# Altium PCB Mikrolysreklamen17.PcbDoc
Units mm, origin at the board's own origin, x right, y up, seen from the top; angles counter-clockwise.
Board outline 168.36 x 42.97 mm, 2 copper layers (Top Layer, Bottom Layer), stack 1.671 mm thick; 121 components, 173 nets, 631 pads, 212 vias.
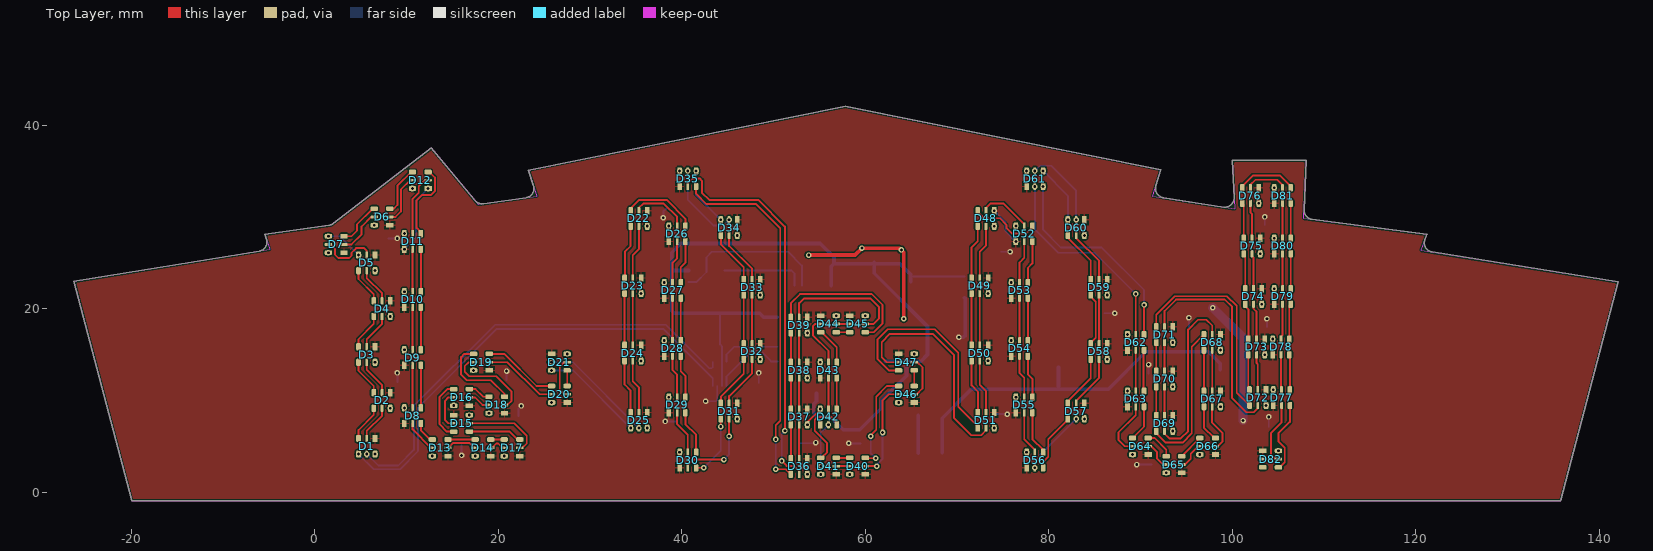
[diagram p0: Top Layer view]
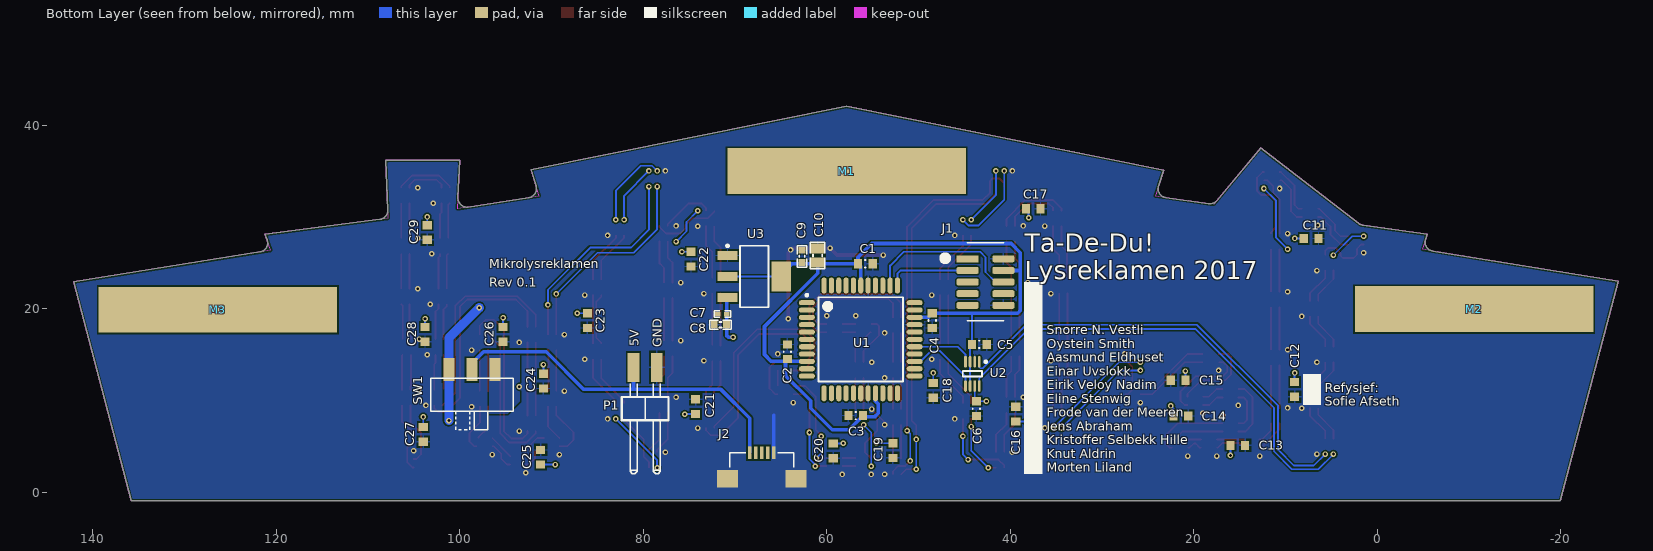
[diagram p1: Bottom Layer view, seen from below]

## Layer stack, top to bottom
Top Solder: solder mask 0.0102, Solder Resist, Dk 3.5
Top Layer: signal copper 0.0356
Dielectric 1: dielectric 1.6, FR-4, Dk 4.8
Bottom Layer: signal copper 0.0356
Bottom Solder: solder mask 0.0102, Solder Resist, Dk 3.5

## Board outline
-19.938,-0.919 -26.27,23 -6.067,26.276 -6.067,26.278 ccw(c-6.222,27.266) -5.272,27.58 -5.44,28.13 1.549,29.094 ccw(c1.423,30.086) 2.06,29.315 12.71,37.53 17.461,31.803 17.46,31.803 ccw(c18.232,32.438) 18.4,31.453 23.04,32.113 ccw(c22.886,33.101) 23.835,33.415 23.833,33.414 23.27,35.11 57.85,42.05 92.25,35.17 91.693,33.38 ccw(c92.65,33.093) 92.526,32.101 99.076,31.08 ccw(c99.217,32.07) 100.215,32.132 100,36.2 108.1,36.2 107.863,30.754 ccw(c108.862,30.722) 108.73,29.731 121.25,28.13 121.02,27.51 ccw(c121.961,27.174) 121.813,26.185 142.09,22.93 135.81,-0.92

## Design rules (kind name [scope] priority, off if disabled: settings)
Clearance [All] p1: gap=0.16 ignorepadtopadclearanceinfootprint=FALSE except(0: Arc-Text Arc-Hole Track-Text Track-Hole SMDPad-Text SMDPad-Hole THPad-Text THPad-Hole Via-Text Via-Hole Fill-Text Fill-Hole Poly-Text Poly-Hole Region-Text Region-Hole Text-Text Text-Hole)
Height [All] p1: minheight=0 maxheight=200 prefheight=12.7
HoleSize [All] p1: absolutevalues=TRUE maxlimit=6.35 minlimit=0.3 maxpercent=80.000 minpercent=20.000
MinimumSolderMaskSliver [All] p1: minsoldermaskwidth=0.1
PlaneClearance [All] p1: clearance=1
PlaneConnect [All] p1: planeconnectstyle=Relief reliefexpansion=0.508 reliefentries=4 reliefconductorwidth=1 reliefairgap=0.254
PolygonConnect PolygonConnect_1 [InNet('DUMMY_NET')] p1: connectstyle=Direct reliefconductorwidth=0.254 reliefentries=4 polygonreliefangle="90 Angle" airgapwidth=0.254
PolygonConnect PolygonConnect_2 [HasFootprint('FCI_10104111-0001LF') vs InNet('GND')] p2: connectstyle=Direct reliefconductorwidth=0.254 reliefentries=4 polygonreliefangle="90 Angle" airgapwidth=0.254
PolygonConnect [All] p3: thpad.connectstyle=Direct thpad.reliefconductorwidth=0.254 thpad.reliefentries=4 thpad.polygonreliefangle="90 Angle" thpad.airgapwidth=0.254 smdpad.connectstyle=Relief smdpad.reliefconductorwidth=0.2 smdpad.reliefentries=4 smdpad.polygonreliefangle="90 Angle" smdpad.airgapwidth=0.2 via.connectstyle=Direct via.reliefconductorwidth=0.254 via.reliefentries=4 via.polygonreliefangle="90 Angle" via.airgapwidth=0.254
RoutingVias [All] p1: holewidth=0.3 width=0.6 viastyle="Through Hole" minholewidth=0.3 minwidth=0.6 maxholewidth=6.35 maxwidth=10
SilkToSolderMaskClearance [IsPad] p1: minsilkscreentomaskgap=0.178 clearancetoexposedcopper=TRUE
SolderMaskExpansion [All] p1: expansion=0.102
Width [All] p1: maxlimit=1 minlimit=0.16 preferedwidth=0.2
24 further rules are at their usual default settings.

## Components (designator, comment, footprint, x,y, rotation, side; value= is the part's Value field where it differs from the comment)
C1 "100nF(0603)" CAPC0603(1608)55_N 55.8,24.9 r0 bottom
C2 "100nF(0603)" CAPC0603(1608)55_N 64.3,15.3 r270 bottom
C3 "100nF(0603)" CAPC0603(1608)55_N 56.85,8.35 r180 bottom
C4 "100nF(0603)" CAPC0603(1608)55_N 48.5,18.7 r90 bottom
C5 "100nF(0603)" CAPC0603(1608)55_N 43.379,16.1 r0 bottom
C6 "100nF(0603)" CAPC0603(1608)55_N 43.7,9.1 r90 bottom
C7 "100nF" CAPC1005X04L 71.4,19.4 r180 bottom
C8 "10µF" CAPC1608X06L 71.6,18.25 r180 bottom
C9 "10µF" CAPC1608X06L 62.7,25.7 r270 bottom
C10 "100µF" CAPC2012X11L 61,25.8 r270 bottom
C11 "100nF(0603)" CAPC0603(1608)55_N 7.2,27.65 r0 bottom
C12 "100nF(0603)" CAPC0603(1608)55_N 9,11.2 r90 bottom
C13 "100nF(0603)" CAPC0603(1608)55_N 15.2,5.1 r0 bottom
C14 "100nF(0603)" CAPC0603(1608)55_N 21.4,8.3 r0 bottom
C15 "100nF(0603)" CAPC0603(1608)55_N 21.7,12.2 r180 bottom
C16 "100nF(0603)" CAPC0603(1608)55_N 39.4,8.5 r270 bottom
C17 "100nF(0603)" CAPC0603(1608)55_N 37.5,30.9 r0 bottom
C18 "100nF(0603)" CAPC0603(1608)55_N 48.4,11.1 r90 bottom
C19 "100nF(0603)" CAPC0603(1608)55_N 52.8,4.533 r90 bottom
C20 "100nF(0603)" CAPC0603(1608)55_N 59.3,4.5 r90 bottom
C21 "100nF(0603)" CAPC0603(1608)55_N 74.3,9.317 r270 bottom
C22 "100nF(0603)" CAPC0603(1608)55_N 74.8,25.4 r90 bottom
C23 "100nF(0603)" CAPC0603(1608)55_N 86.1,18.7 r90 bottom
C24 "100nF(0603)" CAPC0603(1608)55_N 90.9,12.1 r90 bottom
C25 "100nF(0603)" CAPC0603(1608)55_N 91.2,3.8 r270 bottom
C26 "100nF(0603)" CAPC0603(1608)55_N 95.3,17.2 r90 bottom
C27 "100nF(0603)" CAPC0603(1608)55_N 104,6.3 r90 bottom
C28 "100nF(0603)" CAPC0603(1608)55_N 103.8,17.2 r90 bottom
C29 "100nF(0603)" CAPC0603(1608)55_N 103.567,28.3 r90 bottom
D1 "APA102 2020" PCBComponent_1 5.667,5 r270 top
D2 "APA102 2020" PCBComponent_1 7.333,10 r270 top
D3 "APA102 2020" PCBComponent_1 5.667,15 r270 top
D4 "APA102 2020" PCBComponent_1 7.333,20 r270 top
D5 "APA102 2020" PCBComponent_1 5.667,25 r270 top
D6 "APA102 2020" PCBComponent_1 7.333,30 r180 top
D7 "APA102 2020" PCBComponent_1 2.333,27 r180 top
D8 "APA102 2020" PCBComponent_1 10.667,8.333 r90 top
D9 "APA102 2020" PCBComponent_1 10.667,14.667 r90 top
D10 "APA102 2020" PCBComponent_1 10.667,21 r90 top
D11 "APA102 2020" PCBComponent_1 10.667,27.333 r90 top
D12 "APA102 2020" PCBComponent_1 11.5,34 r180 top
D13 "APA102 2020" PCBComponent_1 13.667,4.833 r180 top
D14 "APA102 2020" PCBComponent_1 18.333,4.833 r180 top
D15 "APA102 2020" PCBComponent_1 16,7.5 r0 top
D16 "APA102 2020" PCBComponent_1 16,10.333 r180 top
D17 "APA102 2020" PCBComponent_1 21.5,4.833 r180 top
D18 "APA102 2020" PCBComponent_1 19.833,9.5 r180 top
D19 "APA102 2020" PCBComponent_1 18.167,14.167 r180 top
D20 "APA102 2020" PCBComponent_1 26.667,10.667 r180 top
D21 "APA102 2020" PCBComponent_1 26.667,14.167 r0 top
D22 "APA102 2020" PCBComponent_1 35.333,29.833 r270 top
D23 "APA102 2020" PCBComponent_1 34.667,22.5 r270 top
D24 "APA102 2020" PCBComponent_1 34.667,15.167 r270 top
D25 "APA102 2020" PCBComponent_1 35.333,7.833 r270 top
D26 "APA102 2020" PCBComponent_1 39.5,28.167 r90 top
D27 "APA102 2020" PCBComponent_1 39,22 r90 top
D28 "APA102 2020" PCBComponent_1 39,15.667 r90 top
D29 "APA102 2020" PCBComponent_1 39.5,9.5 r90 top
D30 "APA102 2020" PCBComponent_1 40.667,3.5 r90 top
D31 "APA102 2020" PCBComponent_1 45.167,8.833 r270 top
D32 "APA102 2020" PCBComponent_1 47.667,15.333 r270 top
D33 "APA102 2020" PCBComponent_1 47.667,22.333 r270 top
D34 "APA102 2020" PCBComponent_1 45.167,28.833 r270 top
D35 "APA102 2020" PCBComponent_1 40.667,34.167 r90 top
D36 "APA102 2020" PCBComponent_1 52.8,2.8 r270 top
D37 "APA102 2020" PCBComponent_1 52.8,8.2 r270 top
D38 "APA102 2020" PCBComponent_1 52.8,13.3 r270 top
D39 "APA102 2020" PCBComponent_1 52.8,18.2 r270 top
D40 "APA102 2020" PCBComponent_1 59.167,2.833 r180 top
D41 "APA102 2020" PCBComponent_1 56,2.833 r180 top
D42 "APA102 2020" PCBComponent_1 56,8.2 r90 top
D43 "APA102 2020" PCBComponent_1 56,13.3 r90 top
D44 "APA102 2020" PCBComponent_1 56,18.333 r0 top
D45 "APA102 2020" PCBComponent_1 59.167,18.333 r0 top
D46 "APA102 2020" PCBComponent_1 64.5,10.667 r180 top
D47 "APA102 2020" PCBComponent_1 64.5,14.167 r0 top
D48 "APA102 2020" PCBComponent_1 73.167,29.833 r270 top
D49 "APA102 2020" PCBComponent_1 72.5,22.5 r270 top
D50 "APA102 2020" PCBComponent_1 72.5,15.167 r270 top
D51 "APA102 2020" PCBComponent_1 73.167,7.833 r270 top
D52 "APA102 2020" PCBComponent_1 77.333,28.167 r90 top
D53 "APA102 2020" PCBComponent_1 76.833,22 r90 top
D54 "APA102 2020" PCBComponent_1 76.833,15.667 r90 top
D55 "APA102 2020" PCBComponent_1 77.333,9.5 r90 top
D56 "APA102 2020" PCBComponent_1 78.5,3.5 r90 top
D57 "APA102 2020" PCBComponent_1 83,8.833 r270 top
D58 "APA102 2020" PCBComponent_1 85.5,15.333 r270 top
D59 "APA102 2020" PCBComponent_1 85.5,22.333 r270 top
D60 "APA102 2020" PCBComponent_1 83,28.833 r270 top
D61 "APA102 2020" PCBComponent_1 78.5,34.167 r90 top
D62 "APA102 2020" PCBComponent_1 89.5,16.333 r90 top
D63 "APA102 2020" PCBComponent_1 89.5,10.167 r90 top
D64 "APA102 2020" PCBComponent_1 90,5 r180 top
D65 "APA102 2020" PCBComponent_1 93.667,3 r180 top
D66 "APA102 2020" PCBComponent_1 97.333,5 r180 top
D67 "APA102 2020" PCBComponent_1 97.833,10.167 r270 top
D68 "APA102 2020" PCBComponent_1 97.833,16.333 r270 top
D69 "APA102 2020" PCBComponent_1 92.633,7.5 r270 top
D70 "APA102 2020" PCBComponent_1 92.633,12.333 r270 top
D71 "APA102 2020" PCBComponent_1 92.633,17.167 r270 top
D72 "APA102 2020" PCBComponent_1 102.8,10.3 r270 top
D73 "APA102 2020" PCBComponent_1 102.667,15.833 r270 top
D74 "APA102 2020" PCBComponent_1 102.333,21.333 r270 top
D75 "APA102 2020" PCBComponent_1 102.167,26.833 r270 top
D76 "APA102 2020" PCBComponent_1 102,32.333 r270 top
D77 "APA102 2020" PCBComponent_1 105.4,10.3 r90 top
D78 "APA102 2020" PCBComponent_1 105.333,15.833 r90 top
D79 "APA102 2020" PCBComponent_1 105.5,21.333 r90 top
D80 "APA102 2020" PCBComponent_1 105.5,26.833 r90 top
D81 "APA102 2020" PCBComponent_1 105.5,32.333 r90 top
D82 "APA102 2020" PCBComponent_1 104.2,3.6 r0 top
J1 "Header SMD 127 2x5" SMDHDRV10P127_2X5_615X330X560B 42.7,22.9 r180 bottom
J2 "MicroUSB-AB" FCI_10104111-0001LF 67.1,4.3 r90 bottom
M1 "Imponatornål" Imponatornaal_liten 57.85,35 r180 top
M2 "Imponatornål" Imponatornaal_liten -10.57,19.95 r180 top
M3 "Imponatornål" Imponatornaal_liten 126.39,19.88 r180 top
P1 "Pin List 1x2, Angled" LIST_ANG_1x2-SMD-2.54MM 79.8,13.6 r180 bottom
SW1 "Switch" JS102011SAQN 98.7,10.6 r180 bottom
U1 "AVR ATXMEGA64A4U-AU" TQFP80P1200X1200X120-44N 56.3,16.65 r180 bottom
U2 "TXS0102DCUR" TSSOP50P310X90-8N 44.129,12.891 r270 bottom
U3 "TLV1117" SOT230P700X180-4N 67.9,23.5 r180 bottom

## Footprints (in the part's own frame and the unit in brackets; to place one, negate y for a bottom-side part, rotate by r counter-clockwise, add the part's x,y. Pads: shape width x height; smd on the part's side, far side on the other; paste and mask are expansions set on the pad)
CAPC0603(1608)55_N [mm] "Chip Capacitor, Body 1.6x0.8mm, Height 0.55mm, IPC Medium Density"
  rect 0.9x1 smd: 1(-0.8,0) 2(0.8,0)
  silkscreen extent -0.05,-0.4 0.05,0.4, body extent -0.87,-0.48 0.88,0.47, height 0.55
CAPC1005X04L [mm] "Chip Capacitor, 2-Leads, Body 1.0x0.5mm, IPC High Density"
  rect 0.6x0.5 smd: 1(-0.5,0) 2(0.5,0)
  silkscreen extent -0.9,-0.35 0.9,0.35, body extent -0.51,-0.25 0.51,0.25, height 0.5
CAPC1608X06L [mm] "Chip Capacitor, 2-Leads, Body 1.6x0.8mm, IPC High Density"
  rect 0.75x0.8 smd: 1(-0.675,0) 2(0.675,0)
  silkscreen extent -1.17,-0.5 1.17,0.5, body extent -0.8,-0.43 0.8,0.43, height 0.8
CAPC2012X11L [mm] "Chip Capacitor, 2-Leads, Body 2.0x1.3mm, IPC High Density"
  rect 1.1x1.4 smd: 1(-0.75,0) 2(0.75,0)
  silkscreen extent -1.43,-0.8 1.42,0.8, body extent -1,-0.62 1,0.63, height 0.77
FCI_10104111-0001LF [mm] "Micro USB AB SMT"
  rect 1.4x0.4 smd: 1(0,1.3) 2(0,0.65) 3(0,0) 4(0,-0.65) 5(0,-1.3)
  rect 1.9x2.3 smd: 6(-2.85,-3.75) 6(-2.85,3.75)
  silkscreen extent -1.6,-3.5 0,3.5, body extent -5.6,-4.4 0,4.4, height 2.74
Imponatornaal_liten [mm]
  rect 26x5 smd far side: 0(0,0)
JS102011SAQN [mm] "Slide Switches - SPDT, SMD, ON-ON"
  rect 1.2x2.5 smd: 1(-2.5,2.75) 2(0,2.75) 3(2.5,2.75)
  silkscreen extent -4.5,-3.8 4.5,1.8, body extent -4.52,-3.8 4.52,3.75, height 3.5
LIST_ANG_1x2-SMD-2.54MM [mm] "Pin List, 2.54mm, Surface Mount, Angled"
  rect 1.27x3.18 smd: 1(-1.27,0) 2(1.27,0)
  silkscreen extent -2.54,-11.58 2.54,-1.8, body extent -2.56,-11.61 2.52,1.35, height 3.03
PCBComponent_1 [mm]
  rect 0.8x0.5 smd: 1(-0.85,0.9)
  rrect50% 0.8x0.3 smd: 2(-0.85,0) 5(0.85,0)
  rrect50% 0.8x0.5 smd: 3(-0.85,-0.9) 4(0.85,-0.9) 6(0.85,0.9)
  body extent -1,-1 1,1, height 0.9
SMDHDRV10P127_2X5_615X330X560B [mm] "SMD 2X5 Vertical Header"
  rect 2.4x0.76 smd: 1(-1.95,2.54)
  rrect50% 2.4x0.76 smd: 2(1.95,2.54) 3(-1.95,1.27) 4(1.95,1.27) 5(-1.95,0) 6(1.95,0) 7(-1.95,-1.27) 8(1.95,-1.27) 9(-1.95,-2.54) 10(1.95,-2.54)
  silkscreen extent -4.54,-4.21 1.95,4.29
SOT230P700X180-4N [mm] "SOT223, 4-Leads, Body 6,50x7,00mm (avg), Pitch 2,30mm, IPC Medium Density"
  rect 2.15x1 smd: 1(-2.925,2.3) 2(-2.925,0) 3(-2.925,-2.3)
  rect 2.15x3.25 smd: 4(2.925,0)
  silkscreen extent -3.05,-3.35 1.55,3.47, body extent -3.54,-3.25 3.54,3.25, height 1.65
TQFP80P1200X1200X120-44N [mm] "TQFP, 44-Leads, Body 10,00x10,00mm, Pitch 0,80mm, IPC Medium Density"
  oval 1.75x0.55 smd: 1(-5.875,4) 2(-5.875,3.2) 3(-5.875,2.4) 4(-5.875,1.6) 5(-5.875,0.8) 6(-5.875,0) 7(-5.875,-0.8) 8(-5.875,-1.6) 9(-5.875,-2.4) 10(-5.875,-3.2) 11(-5.875,-4) 23(5.875,-4) 24(5.875,-3.2) 25(5.875,-2.4) 26(5.875,-1.6) 27(5.875,-0.8) 28(5.875,0) 29(5.875,0.8) 30(5.875,1.6) 31(5.875,2.4) 32(5.875,3.2) 33(5.875,4)
  oval 0.55x1.75 smd: 12(-4,-5.875) 13(-3.2,-5.875) 14(-2.4,-5.875) 15(-1.6,-5.875) 16(-0.8,-5.875) 17(0,-5.875) 18(0.8,-5.875) 19(1.6,-5.875) 20(2.4,-5.875) 21(3.2,-5.875) 22(4,-5.875) 34(4,5.875) 35(3.2,5.875) 36(2.4,5.875) 37(1.6,5.875) 38(0.8,5.875) 39(0,5.875) 40(-0.8,5.875) 41(-1.6,5.875) 42(-2.4,5.875) 43(-3.2,5.875) 44(-4,5.875)
  silkscreen extent -6,-4.6 4.6,4.95, body extent -6.03,-5.97 5.97,6.03, height 1.1
TSSOP50P310X90-8N [mm] "TSSOP, 8-Leads, Body 2,1x2,4mm (max), Pitch 0,50mm, IPC Medium Density"
  oval 1.25x0.3 smd: 1(-1.325,0.75) 2(-1.325,0.25) 3(-1.325,-0.25) 4(-1.325,-0.75) 5(1.325,-0.75) 6(1.325,-0.25) 7(1.325,0.25) 8(1.325,0.75)
  silkscreen extent -1.45,-1.05 0.3,1.57, body extent -1.55,-1.05 1.55,1.05, height 0.8

## Part data
C1 C2 C3 C4 C5 C6 C11 C12 C13 C14 C15 C16 C17 C18 C19 C20 C21 C22 C23 C24 C25 C26 C27 C28 C29: library part 3028, "100nF 0603 5% X7R 50V", id=3028, leverandor=Farnell, leverandor_varenr=1759122, navn=100nF(0603), nokkelord="Kondensator, Capacitor, CAP", pakke_opprettet="18.02.2015 14:18:13", pakke_opprettet_av=815, pakketype=93, pris=1, produsent=Multikomp, symbol_opprettet="14.11.2014 20:19:34", symbol_opprettet_av=815
C7: library part C0402-100n, "Capacitor, X7R, ±10%", Artikkelnr Noca=20039200, Artikkelnr Simpro=N.A., Footprint Doc=0402, LatestRevisionDate=2009-11-23, Note=16V, Part Number=C0402-100n, Pin Count=2, Published=2009-05-08, Publisher="Nordic Semiconductor"
C8 C9: library part C0603-10µ, "Capacitor, X5R, ±20%", Artikkelnr Noca=20039234, Artikkelnr Simpro=N.A., Footprint Doc=0603, LatestRevisionDate=2011-01-17, Note=6.3V, Part Number=C0603-10µ, Pin Count=2, Published=2011-01-17, Publisher="Nordic Semiconductor"
C10: library part C0805-TBD, "Chip Cap 0805", Artikkelnr Noca=N.A., Artikkelnr Simpro=N.A., Footprint Doc=0805, LatestRevisionDate=2013-12-17, Note="Chip Cap", Part Number=C0805-TBD, Pin Count=2, Published=2013-12-17, Publisher="Nordic Semiconductor"
D1 D2 D3 D4 D5 D6 D7 D8 D9 D10 D11 D12 D13 D14 D15 D16 D17 D18 D19 D20 D21 D22 D23 D24 D25 D26 D27 D28 D29 D30 D31 D32 D33 D34 D35 D36 D37 D38 D39 D40 D41 D42 D43 D44 D45 D46 D47 D48 D49 D50 D51 D52 D53 D54 D55 D56 D57 D58 D59 D60 D61 D62 D63 D64 D65 D66 D67 D68 D69 D70 D71 D72 D73 D74 D75 D76 D77 D78 D79 D80 D81 D82: library part APA102_2020, AdaFruit=3341, DigiKey=1528-2392-ND
J1: library part 2449, "1,27mm Pitch SMD Header", id=2449, navn="Header SMD 127 2x5", nokkelord=JTAG, pakke_opprettet="15.11.2014 18:30:38", pakke_opprettet_av=815, pakketype=101, pris=20, symbol_opprettet="15.11.2014 18:33:29", symbol_opprettet_av=815
J2: library part "FCI 10104111-0001LF", "MicroUSB-AB-SMT", Manufacturer=FCI, Manufacturer Part Number=10104111-0001LF, Part number IPS=N.A., Supplier Part Number 1=609-4053-1-ND, Artikkelnr Noca=55029118, ComponentLink1Description=Datasheet, ComponentLink2Description="Supplier link", Footprint Doc=FCI_10104111-0001LF, HelpURL=http://portal.fciconnect.com/Comergent//fci/drawing/10104111.pdf, LatestRevisionDate=2014-01-14, Part Number="FCI 10104111-0001LF", Pin Count=5, Published=2014-01-14, Publisher="Nordic Semiconductor", Supplier 1=Digi-Key, Supplier 2=Mouser, Supplier Part Number 2=649-10104111-0001LF
M1 M2 M3: library part 3331, "nål til imponatorplate 20mm (Brooch back)", antall=41, dybde=1, hylle=4, id=3331, lager_type=Fremlager, leverandor_varenr=600721, navn=Imponatornål, nokkelord=cchobby.no, pakke_opprettet="15.11.2018 22:49:40", pakke_opprettet_av=815, pakketype=SMD, pris=5, produsent="Jewellery Maker", rad=0, rom=OV, symbol_opprettet="23.10.2015 21:10:45", symbol_opprettet_av=815
P1: library part "Pin List Ang 1x2 SMD, 2.54mm", "Pin List 1x2, 2.54mm (100mil), Right Angled, SMD", Manufacturer=W-CON, Manufacturer Part Number=1125B-1102S0Z135R2, Part number IPS=N.A., Artikkelnr Noca=55010023, ComponentLink1Description=Datasheet, ComponentLink2Description="Supplier link", Footprint Doc=LIST_ANG_1x2-SMD-2.54MM, HelpURL=\\hizz\pro\app9717\Datasheet\connectores\W-CON\1125B-11XXXXZXXXXX.pdf, LatestRevisionDate=2016-05-26, Part Number="Pin List Ang 1x2 SMD, 2.54mm", Pin Count=2, Published=2016-01-22, Publisher="Nordic Semiconductor", Supplier 1=Cabcon, Supplier 2=Samtec, Supplier Part Number 1=1125B-1102S0Z135R2, Supplier Part Number 2=TSM-102-01-L-SH-A
SW1: library part JS102011SAQN, "SMD slide Switch (ON-ON)", Manufacturer="C&K Components", Part number IPS=N.A., Supplier Part Number 1=401-1999-1-ND, Artikkelnr Noca=50019064, ComponentLink1Description=Datasheet, ComponentLink2Description="Supplier link", Footprint Doc=JS102011SAQN, HelpURL=http://www.ck-components.com/14398/js_14july11.pdf/, LatestRevisionDate=2011-08-15, Manufacturer Part Number=JS102011SAQN, Part Number=JS102011SAQN, Pin Count=3, Published=2011-08-15, Publisher="Nordic Semiconductor", Supplier 1=Digi-Key, Supplier 2=Mouser, Supplier Part Number 2=611-JS102011SAQN
U1: library part 2103, "Mikrokontroller", antall=75, dybde=0, hylle=0, id=2103, kolonne=2, lager_type=Fremlager, navn="AVR ATXMEGA64A4U-AU", pakke_opprettet="22.08.2014 14:00:28", pakke_opprettet_av=774, pakketype=45, pris=0, produsent=Atmel, rad=4, rom=OV, symbol_opprettet="22.08.2014 14:00:55", symbol_opprettet_av=774
U2: "IC VOLT-LEVEL TRANSLATOR 8-US8", Manufacturer="Texas Instruments", Part number IPS=N.A., Supplier Part Number 1=296-21931-1-ND, Artikkelnr Noca=N.A., ComponentLink1Description=Datasheet, ComponentLink2Description="Supplier link", Footprint Doc=8-VFSOP, HelpURL=http://www.ti.com/lit/ds/symlink/txs0102.pdf, LatestRevisionDate=2012-09-06, Manufacturer Part Number=TXS0102DCUR, Note="TEXAS INSTRUMENTS - TXS0102DCUR - IC, TRANSLATOR", Part Number=TXS0102DCUR, Pin Count=8, Published=2012-09-06, Publisher="Nordic Semiconductor", Supplier 1=Digi-Key, Supplier 2=Farnell, Supplier Part Number 2=170-3315
U3: library part TLV1117-33CDCYR, "REG LDO 3.3V 0.8A SOT223", Manufacturer="Texas Instruments", Part number IPS=N.A., Supplier Part Number 1=296-21112-1-ND, Artikkelnr Noca=N.A., ComponentLink1Description=Datasheet, ComponentLink1URL=http://www.ti.com/lit/ds/symlink/tlv1117.pdf, ComponentLink2Description="Supplier link", Footprint Doc=SOT-223, LatestRevisionDate=2018-08-10, Manufacturer Part Number=TLV1117-33CDCYR, Part Number=TLV1117-33CDCYR, Pin Count=4, Published=2018-08-10, Publisher="Nordic Semiconductor", Supplier 1=Digi-Key

## Via types
v1: diameter 0.6, hole 0.3, Top Layer to Bottom Layer, tented both sides, 212 vias

## Nets (pads, with @x,y where several pads share a name; then routed paths per layer and width w, separated by ;. In a path a pad name is that pad's centre, name@x,y a point inside that pad or via, vN(x,y) a via of type N, cw(c..) or ccw(c..) an arc to the next point about the centre after c; other vN are vias at no path point)
CKI: D1.5 U2.1 | length 50
  Bottom Layer w0.2: v1(5.667,4.15) 6.917,2.9 9.1,2.9 10.8,4.6 10.8,9.4 19.65,18.25 38.25,18.25 43,13.5 43.25,13.5 43.379,13.629 U2.1
  other v1: 5.667,4.15
DUMMY_NET: SW1.3
GND: C1.1 C2.1 C3.1 C4.1 C5.1 C6.1 C7.1 C8.1 C9.1 C10.1 C11.1 C12.1 C13.1 C14.1 C15.1 C16.1 C17.1 C18.1 C19.1 C20.1 C21.1 C22.1 C23.1 C24.1 C25.1 C26.1 C27.1 C28.1 C29.1 D1.6 D2.6 D3.6 D4.6 D5.6 D6.6 D7.6 D8.6 D9.6 D10.6 D11.6 D12.6 D13.6 D14.6 D15.6 D16.6 D17.6 D18.6 D19.6 D20.6 D21.6 D22.6 D23.6 D24.6 D25.6 D26.6 D27.6 D28.6 D29.6 D30.6 D31.6 D32.6 D33.6 D34.6 D35.6 D36.6 D37.6 D38.6 D39.6 D40.6 D41.6 D42.6 D43.6 D44.6 D45.6 D46.6 D47.6 D48.6 D49.6 D50.6 D51.6 D52.6 D53.6 D54.6 D55.6 D56.6 D57.6 D58.6 D59.6 D60.6 D61.6 D62.6 D63.6 D64.6 D65.6 D66.6 D67.6 D68.6 D69.6 D70.6 D71.6 D72.6 D73.6 D74.6 D75.6 D76.6 D77.6 D78.6 D79.6 D80.6 D81.6 D82.6 J1.2 J1.10 J2.5 J2.6 P1.2 U1.8 U1.18 U1.30 U1.38 U2.2 U3.1 | length 24.5
  Top Layer w0.2: v1(53.7,7.35) 53.7,7.609 55.1,9.009 v1(55.1,9.05)
  Top Layer w0.4: v1(53.85,25.85) 58.9,25.85 v1(59.65,26.6) 63.75,26.6 v1(63.95,26.4) 64.2,26.15 v1(64.2,18.9)
  Bottom Layer w0.4: J2.5@65.8,4.27 J2.5 65.8,8.35
  other v1: 55.15,1.933 58.317,1.933 53.7,1.95 92.817,2.1 12.817,3.933 17.483,3.933 20.65,3.933 89.15,4.1 96.483,4.1 6.567,4.15 39.767,4.35 77.6,4.35 105.05,4.5 93.533,6.65 74.067,6.983 36.233,7 46.067,7.983 83.9,7.983 16.85,8.4 19,8.6 8.233,9.15 9.767,9.183 98.733,9.317 15.15,9.45 103.7,9.45 25.817,9.767 63.65,9.767 38.6,10.35 76.433,10.35 88.6,11.017 104.5,11.15 93.533,11.483 53.7,12.45 17.3,13.267 6.567,14.15 55.1,14.15 35.567,14.3 73.4,14.317 48.567,14.483 86.4,14.483 103.567,14.983 27.517,15.067 65.35,15.067 98.733,15.483 9.767,15.517 93.533,16.317 38.1,16.517 75.933,16.517 104.433,16.683 88.6,17.183 53.7,17.35 8.233,19.15 56.85,19.233 60.017,19.233 103.233,20.483 48.567,21.483 86.4,21.483 35.567,21.65 73.4,21.65 9.767,21.85 104.6,22.183 38.1,22.85 75.933,22.85 6.567,24.15 103.067,25.983 1.483,26.1 104.6,27.683 46.067,27.983 83.9,27.983 9.767,28.183 74.067,28.983 36.233,29 38.6,29.017 76.433,29.017 6.483,29.1 102.9,31.483 10.65,33.1 104.6,33.183 39.767,35.017 77.6,35.017
NetD1_2: D1.2 D2.5 | length 4
  Top Layer w0.2: D1.2 5.667,6.667 7.333,8.333 D2.5@7.333,9.183
NetD1_3: D1.3 D2.4 | length 4
  Top Layer w0.2: D1.3 4.767,6.767 6.433,8.433 D2.4
NetD2_2: D2.2 D3.5 | length 4
  Top Layer w0.2: D3.5 5.667,13.333 7.333,11.667 D2.2
NetD2_3: D2.3 D3.4 | length 4
  Top Layer w0.2: D3.4 4.767,13.233 6.433,11.567 D2.3
NetD3_2: D3.2 D4.5 | length 4
  Top Layer w0.2: D3.2 5.667,16.667 7.333,18.333 D4.5
NetD3_3: D3.3 D4.4 | length 4
  Top Layer w0.2: D3.3 4.767,16.667 6.433,18.333 D4.4
NetD4_2: D4.2 D5.5 | length 4
  Top Layer w0.2: D5.5 5.667,23.333 7.333,21.667 D4.2
NetD4_3: D4.3 D5.4 | length 4
  Top Layer w0.2: D5.4 4.767,23.233 6.433,21.567 D4.3
NetD5_2: D5.2 D7.5 | length 6.4
  Top Layer w0.2: D7.5 1.733,27 2.2,26.533 2.2,25.897 2.572,25.525 3.75,25.525 4,25.775 4,26.1 4.5,26.6 5.4,26.6 5.667,26.333 D5.2
NetD5_3: D5.3 D7.4 | length 4.1
  Bottom Layer w0.2: v1(1.483,27.9) 2.717,27.9 v1(4.767,25.85)
  other v1: 4.767,25.85 1.483,27.9
NetD6_2: D6.2 D12.5 | length 5.5
  Top Layer w0.2: D6.2 8.8,30 9.4,30.6 9.4,33 10.4,34 D12.5@10.6,34
NetD6_3: D6.3 D12.4 | length 5.4
  Top Layer w0.2: D6.3 8.6,30.9 9,31.3 9,33.4 10.5,34.9 D12.4
NetD6_4: D6.4 D7.3 | length 5
  Top Layer w0.2: D7.3 4,27.9 4.6,28.5 4.6,29.2 6.3,30.9 D6.4
NetD6_5: D6.5 D7.2 | length 5
  Top Layer w0.2: D7.2 4,27 5.1,28.1 5.1,28.957 6.143,30 D6.5
NetD8_2: D8.2 D13.5 | length 3.7
  Top Layer w0.2: D8.2 10.667,6.833 12.7,4.8 D13.5@12.9,4.8
NetD8_3: D8.3 D13.4 | length 2.4
  Top Layer w0.2: D8.3 11.567,6.733 12.567,5.733 D13.4
NetD8_4: D8.4 D9.3 | length 4.6
  Top Layer w0.2: D8.4 D9.3
NetD8_5: D8.5 D9.2 | length 4.6
  Top Layer w0.2: D8.5 D9.2
NetD9_4: D9.4 D10.3 | length 4.6
  Top Layer w0.2: D9.4 D10.3
NetD9_5: D9.5 D10.2 | length 4.6
  Top Layer w0.2: D9.5 D10.2
NetD10_4: D10.4 D11.3 | length 4.6
  Top Layer w0.2: D10.4 D11.3
NetD10_5: D10.5 D11.2 | length 4.6
  Top Layer w0.2: D10.5 D11.2
NetD11_4: D11.4 D12.3 | length 8.7
  Top Layer w0.2: D11.4 11.567,28.333 11.1,28.8 11.1,31.8 11.7,32.4 12.7,32.4 13.1,32.8 13.1,34.3 12.5,34.9 D12.3
NetD11_5: D11.5 D12.2 | length 6.7
  Top Layer w0.2: D11.5 10.667,31.967 11.33,32.63 11.33,33.33 12,34 D12.2
NetD13_2: D13.2 D14.5 | length 3.4
  Top Layer w0.2: D13.2 14.561,4.833 15.101,5.373 16.823,5.373 17.363,4.833 D14.5
NetD13_3: D13.3 D14.4 | length 3
  Top Layer w0.2: D13.3 D14.4
NetD14_2: D14.2 D17.5 | length 1.9
  Top Layer w0.2: D14.2 19.333,4.833 19.8,5.3 20,5.3 20.467,4.833 D17.5
NetD14_3: D14.3 D17.4 | length 1.5
  Top Layer w0.2: D14.3 D17.4
NetD15_2: D15.2 D16.5 | length 4.3
  Top Layer w0.2: D15.2 14.533,7.5 14.2,7.833 14.2,9.967 14.567,10.333 D16.5
NetD15_3: D15.3 D16.4 | length 6.8
  Top Layer w0.2: D15.3 14.4,6.6 13.6,7.4 13.6,10.4 14.433,11.233 D16.4
NetD15_4: D15.4 D17.3 | length 5.9
  Top Layer w0.2: D15.4 21.25,6.6 22.117,5.733 D17.3
NetD15_5: D15.5 D17.2 | length 8.6
  Top Layer w0.2: D15.5 21.75,7.5 23.1,6.15 23.1,5.3 22.633,4.833 D17.2
NetD16_2: D16.2 D18.5 | length 2.5
  Top Layer w0.2: D16.2 17.467,10.333 18.3,9.5 D18.5 D18.5@19,9.5
NetD16_3: D16.3 D18.4 | length 2.5
  Top Layer w0.2: D16.3 17.517,11.233 18.35,10.4 D18.4 D18.4@19.017,10.4
NetD18_2: D18.2 D19.5 | length 9.7
  Top Layer w0.2: D19.5@17.267,14.167 16.767,14.167 16.35,13.75 16.35,13.125 16.834,12.641 19.759,12.641 21.45,10.95 21.45,9.95 21,9.5 D18.2
NetD18_3: D18.3 D19.4 | length 9.3
  Top Layer w0.2: D19.4@17.267,15.067 16.3,15.067 15.95,14.717 15.95,12.8 16.55,12.2 19.2,12.2 20.683,10.717 D18.3
NetD19_2: D19.2 D20.5 | length 8.2
  Top Layer w0.2: D19.2 21,14.167 24.5,10.667 D20.5
NetD19_3: D19.3 D20.4 | length 8.2
  Top Layer w0.2: D19.3 20.667,15.067 24.167,11.567 D20.4
NetD20_2: D20.2 D21.5 | length 4.5
  Top Layer w0.2: D20.2 27.183,10.667 26.7,11.15 26.7,13.65 27.217,14.167 D21.5
NetD20_3: D20.3 D21.4 | length 1.7
  Top Layer w0.2: D20.3 D21.4
NetD21_2: D21.2 D25.5 | length 12.5
  Bottom Layer w0.2: v1(25.817,14.167) 28.15,14.167 v1(35.333,6.983)
  other v1: 35.333,6.983 25.817,14.167
NetD21_3: D21.3 D25.4 | length 11.2
  Bottom Layer w0.2: v1(25.817,13.267) 28.15,13.267 v1(34.433,6.983)
  other v1: 34.433,6.983 25.817,13.267
NetD22_2: D22.2 D26.5 | length 6.2
  Top Layer w0.2: D22.2 35.333,30.983 35.8,31.45 38.05,31.45 39.5,30 D26.5
NetD22_3: D22.3 D26.4 | length 8.2
  Top Layer w0.2: D22.3@34.433,30.7 34.433,30.933 35.35,31.85 38.35,31.85 40.4,29.8 D26.4
NetD22_4: D22.4 D23.3 | length 5.8
  Top Layer w0.2: D23.3@33.8,23.45 33.8,26.2 34.433,26.833 D22.4
NetD22_5: D22.5 D23.2 | length 5.9
  Top Layer w0.2: D23.2 34.667,25.817 35.333,26.483 D22.5 D22.5@35.333,29
NetD23_4: D23.4 D24.3 | length 5.5
  Top Layer w0.2: D24.3@33.767,16.133 D23.4
NetD23_5: D23.5 D24.2 | length 5.6
  Top Layer w0.2: D24.2 D23.5
NetD24_4: D24.4 D25.3 | length 5.9
  Top Layer w0.2: D24.4 33.767,11.733 34.433,11.067 D25.3
NetD24_5: D24.5 D25.2 | length 5.9
  Top Layer w0.2: D24.5@34.667,14.3 34.667,12.083 35.333,11.417 D25.2
NetD26_2: D26.2 D27.5 | length 4.7
  Top Layer w0.2: D27.5 39,25 39.5,25.5 D26.2
NetD26_3: D26.3 D27.4 | length 4.7
  Top Layer w0.2: D27.4 39.9,24.5 40.4,25 D26.3
NetD27_2: D27.2 D28.5 | length 4.6
  Top Layer w0.2: D28.5 D27.2
NetD27_3: D27.3 D28.4 | length 4.6
  Top Layer w0.2: D28.4 D27.3
NetD28_2: D28.2 D29.5 | length 4.7
  Top Layer w0.2: D28.2 39,13.3 39.5,12.8 D29.5
NetD28_3: D28.3 D29.4 | length 4.7
  Top Layer w0.2: D28.3 39.9,13.167 40.4,12.667 D29.4
NetD29_2: D29.2 D30.5 | length 4.8
  Top Layer w0.2: D29.2 39.5,7.4 40.667,6.233 D30.5
NetD29_3: D29.3 D30.4 | length 4.8
  Top Layer w0.2: D29.3 40.4,7.4 41.567,6.233 D30.4
NetD30_2: D30.2 D31.5 | length 9.1
  Top Layer w0.2: D30.2 40.667,2.917 41.3,3.55 v1(44.6,3.55) ; v1(45.167,6.1) D31.5
  Bottom Layer w0.2: v1(44.6,3.55) 45.167,4.117 v1(45.167,6.1)
  other v1: 44.6,3.55 45.167,6.1
NetD30_3: D30.3 D31.4 | length 7
  Top Layer w0.2: D30.3 v1(42.4,2.65) ; v1(44.25,7.15) 44.25,7.967 D31.4
  Bottom Layer w0.2: v1(42.4,2.65) 44.267,4.517 44.25,4.533 v1(44.25,7.15)
  other v1: 42.4,2.65 44.25,7.15
NetD31_2: D31.2 D32.5 | length 5.8
  Top Layer w0.2: D31.2 45.167,10.467 47.667,12.967 D32.5
NetD31_3: D31.3 D32.4 | length 5.8
  Top Layer w0.2: D31.3 44.267,10.418 46.767,12.918 D32.4
NetD32_2: D32.2 D33.5 | length 5.3
  Top Layer w0.2: D32.2 D33.5
NetD32_3: D32.3 D33.4 | length 5.3
  Top Layer w0.2: D32.3 D33.4
NetD33_2: D33.2 D34.5 | length 5.8
  Top Layer w0.2: D34.5 45.167,26.833 47.667,24.333 D33.2
NetD33_3: D33.3 D34.4 | length 5.8
  Top Layer w0.2: D34.4 44.267,27.033 46.767,24.533 D33.3
NetD34_2: D34.2 D35.5 | length 9.1
  Bottom Layer w0.2: v1(40.667,35.017) 40.667,31.883 43.5,29.05 44.533,29.05 v1(45.167,29.683)
  other v1: 45.167,29.683 40.667,35.017
NetD34_3: D34.3 D35.4 | length 6.5
  Bottom Layer w0.2: v1(41.567,35.017) 41.567,32.383 v1(44.267,29.683)
  other v1: 44.267,29.683 41.567,35.017
NetD35_2: D35.2 D36.5 | length 42.5
  Top Layer w0.2: D35.2 40.667,33.667 41.2,34.2 41.95,34.2 42.2,33.95 42.2,32.65 43,31.85 48.35,31.85 51.25,28.95 v1(51.25,6.7) ; v1(50.9,3.4) 51.44,2.86 52.19,2.86 52.8,2.25 D36.5
  Bottom Layer w0.2: v1(50.9,3.4) 50.9,6.35 v1(51.25,6.7)
  other v1: 50.9,3.4 51.25,6.7
NetD35_3: D35.3 D36.4 | length 39.9
  Top Layer w0.2: D35.3 41.567,32.533 42.7,31.4 48.133,31.4 50.75,28.783 50.75,7.8 50.25,7.3 v1(50.25,5.75) ; v1(50.25,2.5) 51.35,2.5 D36.4
  Bottom Layer w0.2: v1(50.25,2.5) v1(50.25,5.75)
  other v1: 50.25,2.5 50.25,5.75
NetD36_2: D36.2 D37.5 | length 3.7
  Top Layer w0.2: D36.2 D37.5
NetD36_3: D36.3 D37.4 | length 3.7
  Top Layer w0.2: D36.3 D37.4
NetD37_2: D37.2 D38.5 | length 3.4
  Top Layer w0.2: D37.2 D38.5
NetD37_3: D37.3 D38.4 | length 3.4
  Top Layer w0.2: D37.3 D38.4
NetD38_2: D38.2 D39.5 | length 3.2
  Top Layer w0.2: D38.2 D39.5
NetD38_3: D38.3 D39.4 | length 3.2
  Top Layer w0.2: D38.3 D39.4
NetD39_2: D39.2 D45.5 | length 13.8
  Top Layer w0.2: D39.2 52.8,20.6 53.3,21.1 60.6,21.1 61.5,20.2 61.5,18.9 60.933,18.333 D45.5
NetD39_3: D39.3 D45.4 | length 16.7
  Top Layer w0.2: D39.3 51.9,20.6 52.9,21.6 60.7,21.6 61.9,20.4 61.9,18.4 60.933,17.433 D45.4
NetD40_2: D40.2 D46.5 | length 10.7
  Top Layer w0.2: D40.2 v1(61.25,2.833) ; v1(61.9,6.5) 61.9,10 62.567,10.667 D46.5
  Bottom Layer w0.2: v1(61.25,2.833) 61.25,3.008 61.9,3.658 v1(61.9,6.5)
  other v1: 61.25,2.833 61.9,6.5
NetD40_3: D40.3 D46.4 | length 11.3
  Top Layer w0.2: D40.3 60.05,3.7 v1(61.15,3.7) ; v1(60.6,6.1) 60.6,6.2 61.2,6.8 61.2,10.4 62.367,11.567 D46.4
  Bottom Layer w0.2: v1(60.6,6.1) 60.6,4.25 v1(61.15,3.7)
  other v1: 61.15,3.7 60.6,6.1
NetD40_4: D40.4 D41.3 | length 1.5
  Top Layer w0.2: D41.3 D40.4
NetD40_5: D40.5 D41.2 | length 1.5
  Top Layer w0.2: D41.2 D40.5
NetD41_4: D41.4 D42.3 | length 8.1
  Top Layer w0.2: D41.4 55.233,3.733 55.85,4.35 55.85,5.35 54.5,6.7 54.5,7.9 54.8,8.2 56.3,8.2 56.9,7.6 D42.3
NetD41_5: D41.5 D42.2 | length 4.9
  Bottom Layer w0.2: v1(55.15,2.833) 55.16,2.843 55.16,5.632 55.15,5.642 55.15,6.5 v1(56,7.35)
  other v1: 55.15,2.833 56,7.35
NetD42_4: D42.4 D43.3 | length 3.4
  Top Layer w0.2: D42.4 D43.3
NetD42_5: D42.5 D43.2 | length 3.4
  Top Layer w0.2: D42.5 D43.2
NetD43_4: D43.4 D44.3 | length 4.1
  Top Layer w0.2: D44.3 55.267,17.433 56.9,15.8 D43.4
NetD43_5: D43.5 D44.2 | length 5.6
  Top Layer w0.2: D44.2 54.567,18.333 54.3,18.067 54.3,17.1 56,15.4 D43.5
NetD44_4: D44.4 D45.3 | length 1.5
  Top Layer w0.2: D44.4 D45.3
NetD44_5: D44.5 D45.2 | length 1.5
  Top Layer w0.2: D44.5 D45.2
NetD46_2: D46.2 D47.5 | length 4.6
  Top Layer w0.2: D46.2 65.617,10.667 66.25,11.3 66.25,13.6 65.683,14.167 D47.5
NetD46_3: D46.3 D47.4 | length 1.7
  Top Layer w0.2: D46.3@65.35,11.6 D47.4
NetD47_2: D47.2 D51.5 | length 24.5
  Top Layer w0.2: D47.2 62.333,14.167 61.8,14.7 61.8,16.35 62.7,17.25 67.35,17.25 69.7,14.9 69.7,8.05 71.55,6.2 72.65,6.2 73.167,6.717 D51.5 D51.5@73.167,7
NetD47_3: D47.3 D51.4 | length 24.4
  Top Layer w0.2: D47.3 62.583,13.267 61.35,14.5 61.35,16.65 62.45,17.75 67.583,17.75 70.15,15.183 70.15,9.3 72.267,7.183 D51.4
NetD48_2: D48.2 D52.5 | length 5.8
  Top Layer w0.2: D48.2 73.167,30.967 73.65,31.45 75.1,31.45 77.333,29.217 D52.5
NetD48_3: D48.3 D52.4 | length 7.7
  Top Layer w0.2: D48.3 72.267,30.583 73,29.85 74.7,29.85 75.4,29.15 75.4,28.8 76,28.2 77.55,28.2 78.233,28.883 D52.4
NetD48_4: D48.4 D49.3 | length 5.9
  Top Layer w0.2: D49.3 71.6,26.7 72.267,27.367 D48.4
NetD48_5: D48.5 D49.2 | length 5.9
  Top Layer w0.2: D49.2 72.5,26.2 73.167,26.867 D48.5@73.167,29
NetD49_4: D49.4 D50.3 | length 5.6
  Top Layer w0.2: D50.3@71.6,16 D49.4
NetD49_5: D49.5 D50.2 | length 5.6
  Top Layer w0.2: D50.2 D49.5
NetD50_4: D50.4 D51.3 | length 6
  Top Layer w0.2: D50.4 71.6,11.633 72.3,10.933 D51.3@72.3,8.65
NetD50_5: D50.5 D51.2 | length 5.9
  Top Layer w0.2: D50.5@72.5,14.3 72.5,11.7 73.167,11.033 D51.2
NetD52_2: D52.2 D53.5 | length 4.7
  Top Layer w0.2: D53.5 76.833,25.033 77.333,25.533 D52.2
NetD52_3: D52.3 D53.4 | length 4.7
  Top Layer w0.2: D53.4 77.733,24.433 78.233,24.933 D52.3
NetD53_2: D53.2 D54.5 | length 4.6
  Top Layer w0.2: D54.5 D53.2
NetD53_3: D53.3 D54.4 | length 4.6
  Top Layer w0.2: D54.4 D53.3
NetD54_2: D54.2 D55.5 | length 4.7
  Top Layer w0.2: D54.2 76.833,12.967 77.333,12.467 D55.5
NetD54_3: D54.3 D55.4 | length 4.7
  Top Layer w0.2: D54.3 77.733,12.867 78.233,12.367 D55.4
NetD55_2: D55.2 D56.5 | length 4.8
  Top Layer w0.2: D55.2 77.333,5.767 78.5,4.6 D56.5
NetD55_3: D55.3 D56.4 | length 4.8
  Top Layer w0.2: D55.3 78.233,5.767 79.4,4.6 D56.4
NetD56_2: D56.2 D57.5 | length 7.2
  Bottom Layer w0.2: v1(78.5,2.65) 78.5,3.483 v1(83,7.983)
  other v1: 78.5,2.65 83,7.983
NetD56_3: D56.3 D57.4 | length 6.5
  Top Layer w0.2: D56.3 79.4,3.3 79.95,3.85 79.95,5.75 82.1,7.9 D57.4
NetD57_2: D57.2 D58.5 | length 5.8
  Top Layer w0.2: D57.2 83,9.967 85.5,12.467 D58.5
NetD57_3: D57.3 D58.4 | length 5.8
  Top Layer w0.2: D57.3 82.1,9.9 84.6,12.4 D58.4
NetD58_2: D58.2 D59.5 | length 5.3
  Top Layer w0.2: D58.2 D59.5
NetD58_3: D58.3 D59.4 | length 5.7
  Top Layer w0.2: D58.3 84.6,16.3 85.14,16.84 85.14,20.76 84.6,21.3 D59.4
NetD59_2: D59.2 D60.5 | length 5.8
  Top Layer w0.2: D60.5 83,27.7 85.5,25.2 D59.2
NetD59_3: D59.3 D60.4 | length 5.8
  Top Layer w0.2: D60.4 82.1,27.75 84.6,25.25 D59.3
NetD60_2: D60.2 D61.5 | length 9
  Bottom Layer w0.2: v1(78.5,35.017) 79.06,35.577 80.273,35.577 83,32.85 v1(83,29.683)
  other v1: 83,29.683 78.5,35.017
NetD60_3: D60.3 D61.4 | length 6.5
  Bottom Layer w0.2: v1(79.4,35.017) 82.1,32.317 v1(82.1,29.683)
  other v1: 82.1,29.683 79.4,35.017
NetD61_2: D61.2 D62.5 | length 23.3
  Top Layer w0.2: v1(78.5,33.317) D61.2@78.5,33.6 ; D62.5 v1(89.5,21.6)
  Bottom Layer w0.2: v1(78.5,33.317) 78.5,28.65 81.05,26.1 85,26.1 v1(89.5,21.6)
  other v1: 89.5,21.6 78.5,33.317
NetD61_3: D61.3 D62.4 | length 23.3
  Top Layer w0.2: D62.4 v1(90.4,20.4)
  Bottom Layer w0.2: v1(79.4,33.317) 79.4,28.6 81.35,26.65 85.8,26.65 90.4,22.05 v1(90.4,20.4)
  other v1: 90.4,20.4 79.4,33.317
NetD62_2: D62.2 D63.5 | length 4.5
  Top Layer w0.2: D63.5 D62.2
NetD62_3: D62.3 D63.4 | length 4.5
  Top Layer w0.2: D63.4 90.34,11.077 90.34,15.423 D62.3
NetD63_2: D63.2 D64.5 | length 6.2
  Top Layer w0.2: D64.5 88.3,5 87.6,5.7 87.6,6.5 89.5,8.4 D63.2
NetD63_3: D63.3 D64.4 | length 3.9
  Top Layer w0.2: D64.4 90.4,7.15 D63.3
NetD64_2: D64.2 D65.5 | length 3.2
  Top Layer w0.2: D64.2 91.2,5 91.8,4.4 91.8,3.7 92.5,3 D65.5
NetD64_3: D64.3 D65.4 | length 3.2
  Top Layer w0.2: D64.3 91.55,5.9 92.817,4.633 D65.4
NetD65_2: D65.2 D66.5 | length 3.1
  Top Layer w0.2: D65.2 94.85,3 95.5,3.65 95.5,4.2 96.3,5 D66.5
NetD65_3: D65.3 D66.4 | length 2.8
  Top Layer w0.2: D65.3 94.517,3.933 D66.4
NetD66_2: D66.2 D67.5 | length 5.3
  Top Layer w0.2: D67.5 97.8,9.283 97.8,7.6 98.95,6.45 98.95,5.5 98.45,5 D66.2
NetD66_3: D66.3 D67.4 | length 3.8
  Top Layer w0.2: D67.4 96.933,7.017 D66.3@97.983,5.967
NetD67_2: D67.2 D68.5 | length 4.5
  Top Layer w0.2: D67.2 D68.5@97.833,15.517
NetD67_3: D67.3 D68.4 | length 4.5
  Top Layer w0.2: D67.3 D68.4
NetD68_2: D68.2 D69.5 | length 18.8
  Top Layer w0.2: D69.5 92.633,6.367 93.15,5.85 94.4,5.85 95.2,6.65 95.2,17.717 96.283,18.8 97.2,18.8 97.833,18.167 D68.2
NetD68_3: D68.3 D69.4 | length 16.3
  Top Layer w0.2: D69.4 91.733,6.417 92.75,5.4 94.6,5.4 95.6,6.4 95.6,15.85 D68.3
NetD69_2: D69.2 D70.5 | length 3.1
  Top Layer w0.2: D69.2 D70.5
NetD69_3: D69.3 D70.4 | length 3.1
  Top Layer w0.2: D69.3 D70.4
NetD70_2: D70.2 D71.5 | length 3.1
  Top Layer w0.2: D70.2 D71.5
NetD70_3: D70.3 D71.4 | length 3.1
  Top Layer w0.2: D70.3 D71.4
NetD71_2: D71.2 D72.5 | length 23.8
  Top Layer w0.2: D71.2 92.633,19.733 93.9,21 99.2,21 100,20.2 100,10.25 101.55,8.7 102.35,8.7 102.8,9.15 D72.5
NetD71_3: D71.3 D72.4 | length 22.8
  Top Layer w0.2: D71.3 91.733,19.342 93.751,21.36 99.44,21.36 100.5,20.3 100.5,10.85 D72.4
NetD72_2: D72.2 D73.5 | length 3.9
  Top Layer w0.2: D73.5 102.667,14.083 102.8,13.95 D72.2
NetD72_3: D72.3 D73.4 | length 3.7
  Top Layer w0.2: D73.4 101.767,11.333 D72.3@101.8,11.3
NetD73_2: D73.2 D74.5 | length 3.9
  Top Layer w0.2: D74.5 102.333,20 102.667,19.667 D73.2
NetD73_3: D73.3 D74.4 | length 3.9
  Top Layer w0.2: D74.4 101.433,20.267 101.8,19.9 D73.3@101.8,16.7
NetD74_2: D74.2 D75.5 | length 3.9
  Top Layer w0.2: D75.5 102.167,25.733 102.333,25.567 D74.2
NetD74_3: D74.3 D75.4 | length 3.9
  Top Layer w0.2: D75.4 101.433,25.817 D74.3
NetD75_2: D75.2 D76.5 | length 3.9
  Top Layer w0.2: D76.5@102,31.5 102,30.5 102.167,30.333 D75.2
NetD75_3: D75.3 D76.4 | length 3.9
  Top Layer w0.2: D76.4 101.267,31.317 D75.3
NetD76_2: D76.2 D81.5 | length 4.6
  Top Layer w0.2: D76.2 102,33.5 102.55,34.05 104.9,34.05 105.5,33.45 D81.5
NetD76_3: D76.3 D81.4 | length 6.6
  Top Layer w0.2: D76.3 101.1,33.35 102.25,34.5 105.25,34.5 106.4,33.35 D81.4
NetD77_2: D77.2 D82.5 | length 6.8
  Top Layer w0.2: D82.5 104.75,3.6 104.25,4.1 104.25,6.45 105.4,7.6 D77.2
NetD77_3: D77.3 D82.4 | length 7.9
  Top Layer w0.2: D82.4 105.2,2.7 105.75,3.25 105.75,4.85 105.05,5.55 105.05,6.4 106.3,7.65 D77.3
NetD77_4: D77.4 D78.3 | length 3.9
  Top Layer w0.2: D78.3 106.3,14.917 D77.4
NetD77_5: D77.5 D78.2 | length 3.9
  Top Layer w0.2: D78.2 105.333,11.55 105.4,11.483 D77.5
NetD78_4: D78.4 D79.3 | length 3.9
  Top Layer w0.2: D78.4 106.233,20.317 D79.3
NetD78_5: D78.5 D79.2 | length 3.9
  Top Layer w0.2: D78.5 105.333,16.983 105.5,17.15 D79.2
NetD79_4: D79.4 D80.3 | length 3.8
  Top Layer w0.2: D79.4 D80.3
NetD79_5: D79.5 D80.2 | length 3.8
  Top Layer w0.2: D79.5 D80.2
NetD80_4: D80.4 D81.3 | length 3.8
  Top Layer w0.2: D80.4 D81.3
NetD80_5: D80.5 D81.2 | length 3.8
  Top Layer w0.2: D80.5 D81.2
NetJ2_1: J2.1 P1.1 SW1.2 | length 40.7
  Bottom Layer w0.4: J2.1 68.4,8.05 71.55,11.2 81.1,11.2 ; P1.1 81.07,11.23 81.1,11.2 ; SW1.2 98.7,14.017 97.417,15.3 90.6,15.3 86.5,11.2 81.1,11.2
NetU1_25: U1.25 U2.5 | length 8.2
  Bottom Layer w0.2: U2.5 44.879,12.579 47.7,15.4 48.6,15.4 49.75,14.25 U1.25
NetU1_27: U1.27 U2.4 | length 6.7
  Bottom Layer w0.2: U2.4 44.879,14.979 45.75,15.85 U1.27
PDI_CLOCK: J1.6 U1.35 | length 17.5
  Bottom Layer w0.2: J1.6 41.6,22.9 42.7,24 42.7,25.608 43.292,26.2 51.6,26.2 53.1,24.7 U1.35
PDI_DATA: J1.3 U1.34 | length 9.1
  Bottom Layer w0.2: J1.3 51.93,24.17 52.3,23.8 U1.34
SDI: D1.4 U2.8 | length 51.5
  Bottom Layer w0.2: v1(4.767,4.15) 6.417,2.5 9.3,2.5 11.25,4.45 11.25,9.2 19.85,17.8 38,17.8 43.379,12.421 U2.8
  other v1: 4.767,4.15
VCC_P3V3: C1.2 C2.2 C3.2 C4.2 C5.2 C9.2 C10.2 J1.4 U1.9 U1.19 U1.31 U1.39 U2.3 U2.6 U3.2 U3.4 | length 100.5
  Bottom Layer w0.2: 44.179,19.5 C5.2 44.379,15.9 U2.3 U2.6 ; U3.4 U3.2
  Bottom Layer w0.4: J1.4 38.93,24.17 38.9,24.2 ; U1.31 48.95,19.05 C4.2 44.179,19.5 39.2,19.5 38.9,19.8 38.9,24.2 ; U1.19 54.7,9.9 54.4,9.6 54.4,8.6 54.8,8.2 56.2,8.2 57.6,6.8 59.4,6.8 61.75,9.15 61.75,9.95 64.5,12.7 C2.2@64.5,14.25 ; U1.39 56.3,24.6 C1.2 ; C10.2 C10.2@61,24.9 ; U1.9 C2.2@64.5,14.25 ; U3.4@64.975,22.925 U3.4 64.975,23.725 63.8,24.9 C10.2@61,24.9 ; 38.9,24.2 38.9,26.1 39.9,27.1 55.1,27.1 56.6,25.6 C1.2 ; C1.2 C10.2@61,24.9 ; C10.2@61,24.9 61,23.85 66.8,18.05 66.8,15 66.05,14.25 C2.2@64.5,14.25
VDD: C6.2 C7.2 C8.2 C11.2 C12.2 C13.2 C14.2 C15.2 C16.2 C17.2 C18.2 C19.2 C20.2 C21.2 C22.2 C23.2 C24.2 C25.2 C26.2 C27.2 C28.2 C29.2 D1.1 D2.1 D3.1 D4.1 D5.1 D6.1 D7.1 D8.1 D9.1 D10.1 D11.1 D12.1 D13.1 D14.1 D15.1 D16.1 D17.1 D18.1 D19.1 D20.1 D21.1 D22.1 D23.1 D24.1 D25.1 D26.1 D27.1 D28.1 D29.1 D30.1 D31.1 D32.1 D33.1 D34.1 D35.1 D36.1 D37.1 D38.1 D39.1 D40.1 D41.1 D42.1 D43.1 D44.1 D45.1 D46.1 D47.1 D48.1 D49.1 D50.1 D51.1 D52.1 D53.1 D54.1 D55.1 D56.1 D57.1 D58.1 D59.1 D60.1 D61.1 D62.1 D63.1 D64.1 D65.1 D66.1 D67.1 D68.1 D69.1 D70.1 D71.1 D72.1 D73.1 D74.1 D75.1 D76.1 D77.1 D78.1 D79.1 D80.1 D81.1 D82.1 SW1.1 U2.7 U3.3 | length 55.3
  Bottom Layer w0.2: C11.2 v1(9,27.65) ; C12.2 v1(9,13) ; v1(9.767,26.483) 11.05,27.767 11.05,31.8 v1(12.35,33.1) ; v1@16,3.933 v1(16,4) C13.2 ; C15.2 v1(20.9,13.2) ; C14.2 22.2,9.1 v1(22.5,9.4) ; v1(38,29.9) 38,30.6 C17.2 ; v1(38.2,7.7) C16.2 ; v1(42.6,9.9) C6.2 43.879,10.079 U2.7 ; C18.2 v1(48.4,13) ; C19.2 54.533,5.333 v1(54.6,5.4) ; v1(58.2,5.333) 58.233,5.3 C20.2@59.5,5.3 ; v1(74.067,30.683) 75.3,29.45 75.3,28.45 v1(76.433,27.317) ; C21.2 75.483,8.517 v1(75.5,8.5) ; C22.2 v1(75.8,26.2) ; C23.2 v1(87.2,19.5) ; v1(89.6,3) C25.2 ; C24.2 v1(90.9,13.9) ; C26.2 v1(95.3,19) ; C29.2 v1(103.567,30) ; C28.2 v1(103.8,18.9) ; C27.2 v1(104,8.2)
  Bottom Layer w0.4: v1(70.217,16.871) 70.721,16.871 70.925,17.075 C8.2 70.925,21.1 U3.3
  Bottom Layer w1: v1(97.9,20.1) 101.2,16.8 SW1.1 v1(101.2,7.8)
  other v1: 89.6,3 16,4 58.2,5.333 54.6,5.4 38.2,7.7 101.2,7.8 104,8.2 75.5,8.5 22.5,9.4 42.6,9.9 9,13 48.4,13 20.9,13.2 90.9,13.9 70.217,16.871 103.8,18.9 95.3,19 87.2,19.5 97.9,20.1 75.8,26.2 9.767,26.483 76.433,27.317 9,27.65 38,29.9 103.567,30 74.067,30.683 12.35,33.1
pads on no net: D82.2 D82.3 J1.1 J1.5 J1.7 J1.8 J1.9 J2.2 J2.3 J2.4 M1.0 M2.0 M3.0 U1.1 U1.2 U1.3 U1.4 U1.5 U1.6 U1.7 U1.10 U1.11 U1.12 U1.13 U1.14 U1.15 U1.16 U1.17 U1.20 U1.21 U1.22 U1.23 U1.24 U1.26 U1.28 U1.29 U1.32 U1.33 U1.36 U1.37 U1.40 U1.41 U1.42 U1.43 U1.44

## Polygon pours and split planes (outlines as drawn)
GND on Bottom Layer "GND_L02_P006" (solid, remove dead copper, pour order 6): -26.27,-0.92 -26.27,42.05 142.09,42.05 142.09,-0.92
DUMMY_NET on Bottom Layer "Top Layer-gnd" (solid, pour order 2): 96.8,15.033 96.483,15.35 93.45,15.35 93.45,9.9 94.8,8.55 96.75,8.55 96.8,8.6
VDD on Top Layer "VDD_L01_P004" (solid, remove dead copper, pour order 4): -26.27,-0.92 -26.27,42.05 142.09,42.05 142.09,-0.92

## Keep-outs
Keep-Out Layer:
  lines w0.1: -19.94,-0.92 135.81,-0.92 142.09,22.93 120.6,26.38 121.25,28.13 107.821,29.848 108.1,36.2 100,36.2 100.28,30.893 91.35,32.28 92.25,35.17 57.85,42.05 23.27,35.11 24.21,32.28 17.82,31.37 12.71,37.53 1.82,29.13 -5.44,28.13 -4.93,26.46 -26.27,23 -19.938,-0.919

## Silkscreen, mask and mechanical layers (free items; w line width, h text height)
Top Overlay:
  text "b" at -0.1,-34.1 h173
Bottom Overlay:
  rectangle: 6.1,9.5 8.1,12.9
  rectangle: 36.5,2 38.5,22.9
  text "Mikrolysreklamen" at 96.8,24.4 h1
  text "Ta-De-Du! / Lysreklamen 2017" at 38.4,23.2 h2
  text "Rev 0.1" at 96.8,22.4 h1
  text "5V" at 80.5,15.9 h1 r270
  text "GND" at 78,15.8 h1 r270
  text "Refysjef: / Sofie Afseth" at 5.7,9.4 h1
  text "Snorre N. Vestli / Oystein Smith / Aasmund Eldhuset / Einar Uvslokk / Eirik Veloy Nadim / Eline Stenwig / Frode van der Meeren / Jens Abraham / Kristoffer Selbekk Hille / Knut Aldrin / Morten Liland" at 36,2.2 h1
Top Solder:
  text "a" at -25.767,-34.3 h173
Mechanical 1:
  lines w0.1: -19.94,-0.92 135.81,-0.92 142.09,22.93 121.813,26.185 cw(c121.961,27.174) 121.02,27.51 121.25,28.13 108.73,29.731 cw(c108.862,30.722) 107.863,30.754 108.1,36.2 100,36.2 100.215,32.132 cw(c99.217,32.07) 99.076,31.08 92.526,32.101 cw(c92.65,33.093) 91.693,33.38 92.25,35.17 57.85,42.05 23.27,35.11 23.833,33.414 ; -19.938,-0.919 -26.27,23 -6.067,26.276 ; -6.067,26.278 ccw(c-6.222,27.266) -5.272,27.58 -5.44,28.13 1.549,29.094 ccw(c1.423,30.086) 2.06,29.315 12.71,37.53 17.461,31.803 ; 17.46,31.803 ccw(c18.232,32.438) 18.4,31.453 23.04,32.113 ccw(c22.886,33.101) 23.835,33.415